# Altium PCB PlacaE3.PcbDoc
Units mm, origin at the board's own origin, x right, y up, seen from the top; angles counter-clockwise.
Board outline 100 x 100 mm, 2 copper layers (Top Layer, Bottom Layer); 70 components, 94 nets, 269 pads, 30 vias.
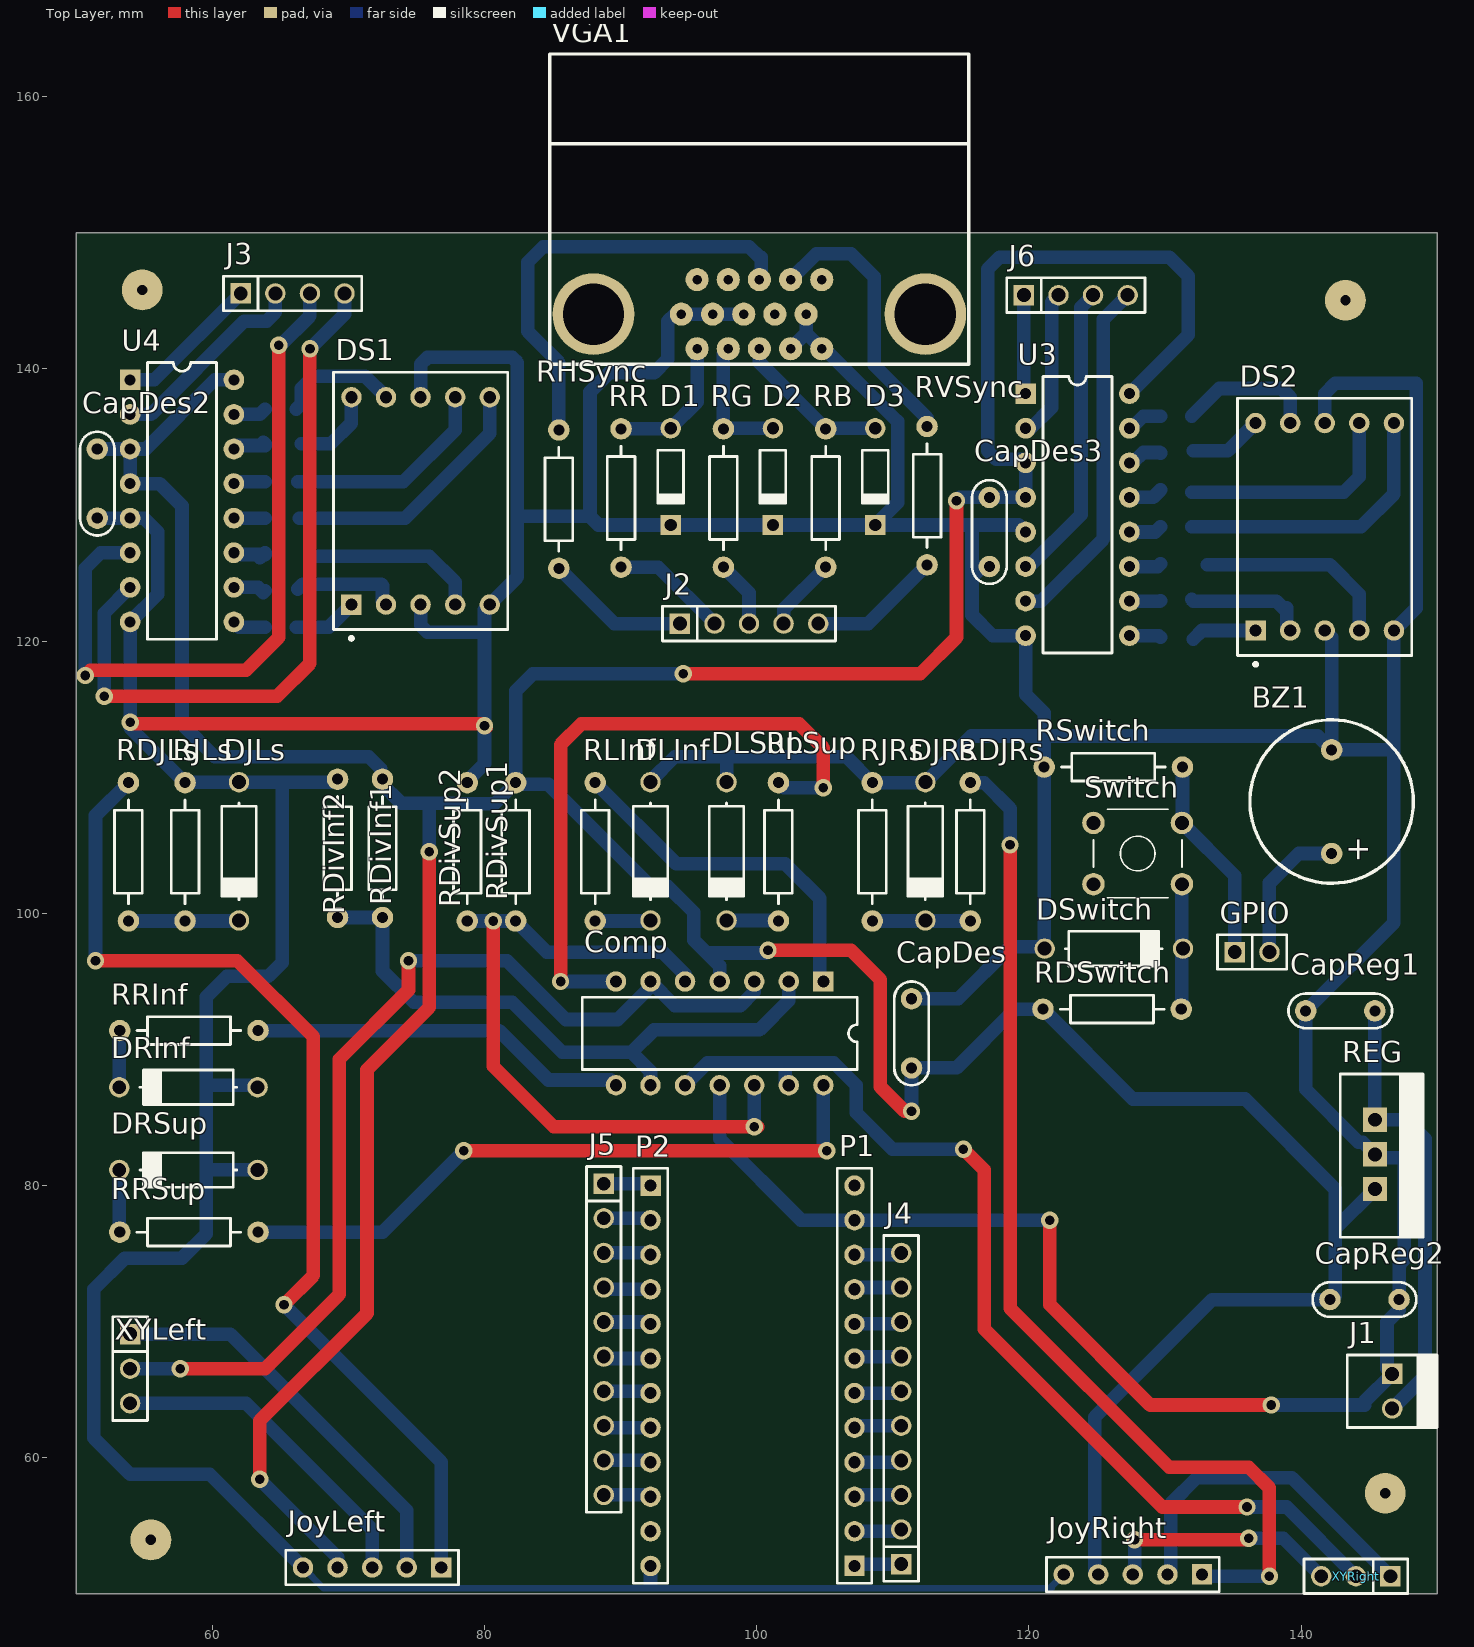
[diagram p0: Top Layer view]
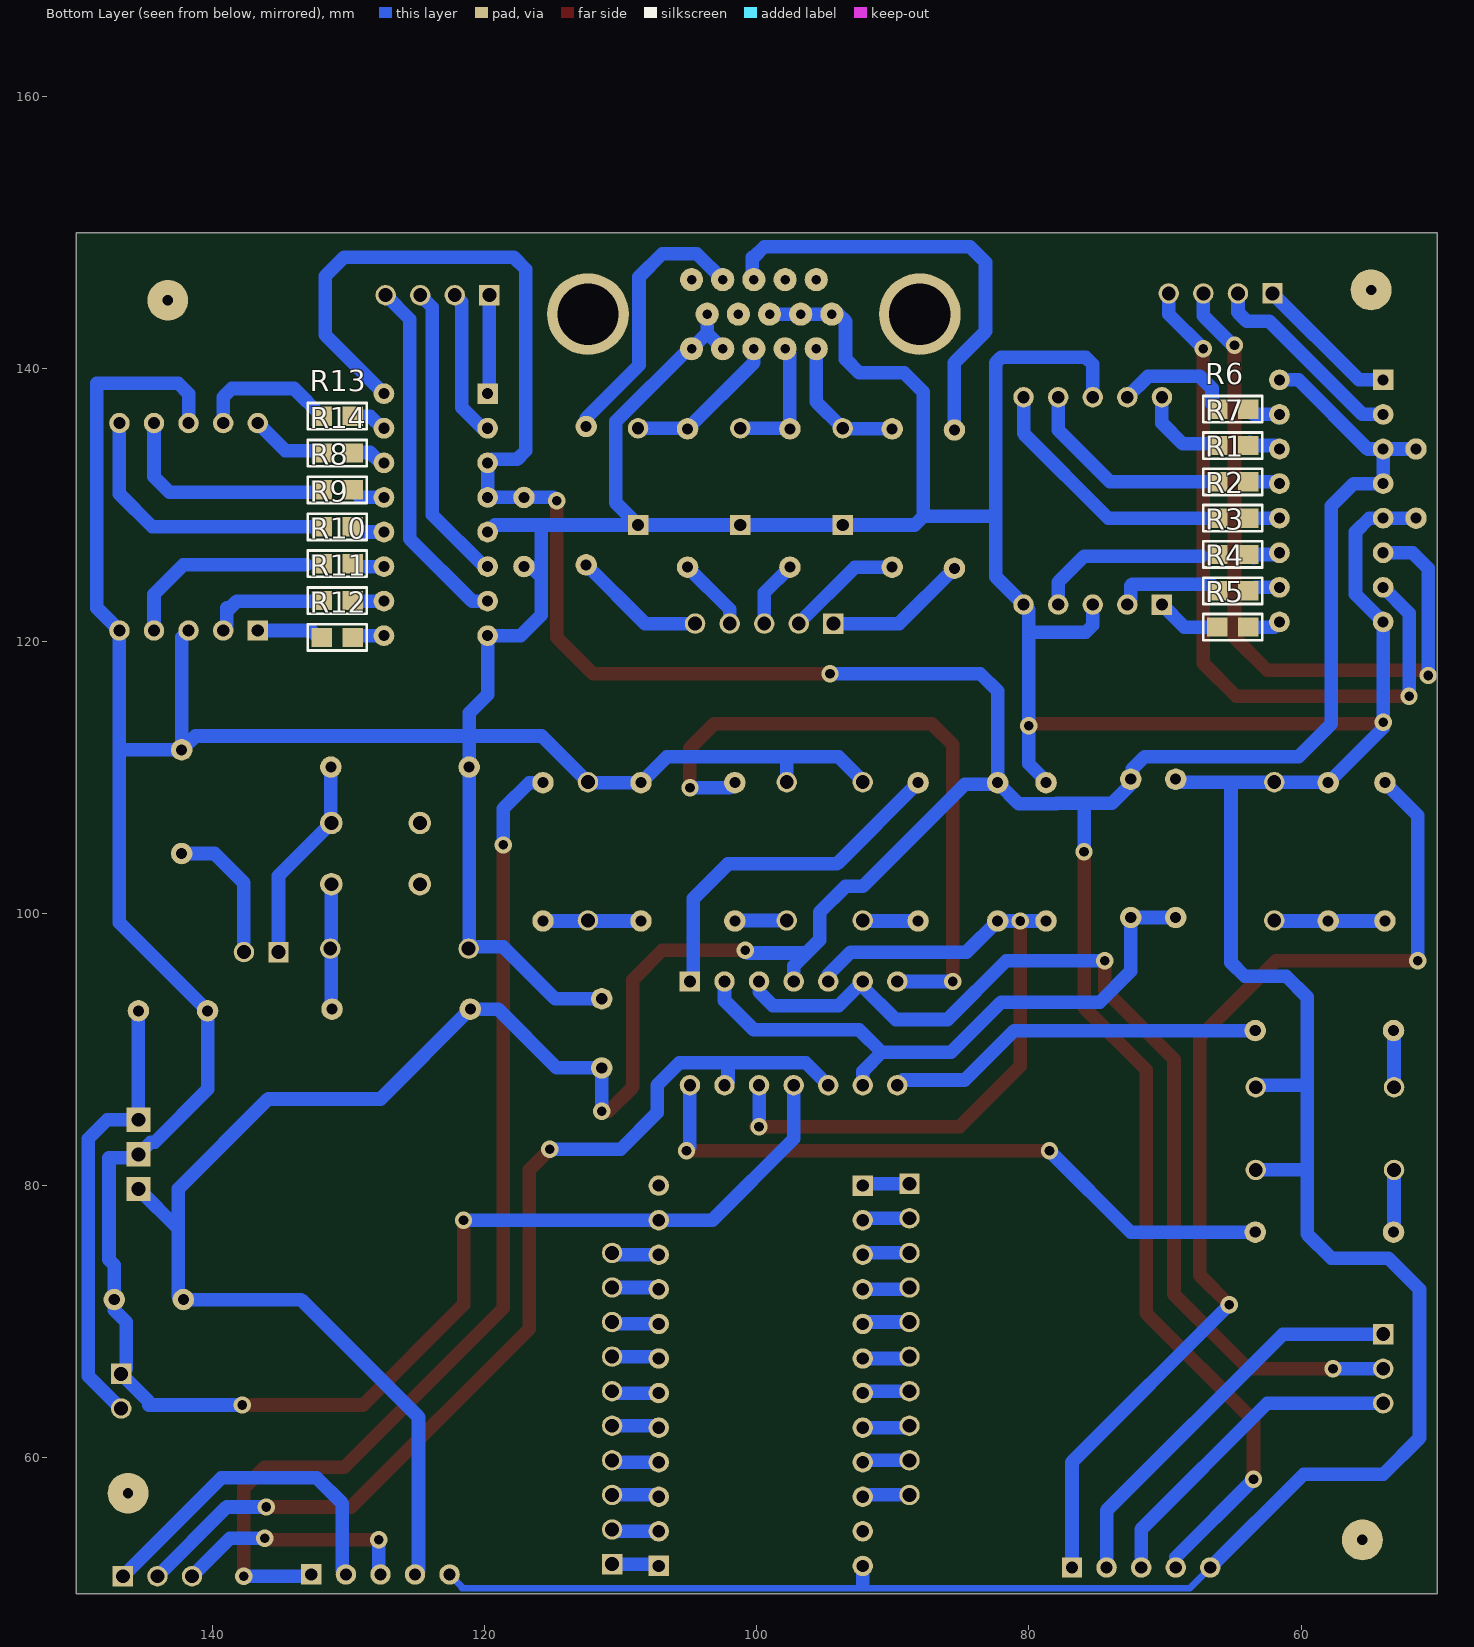
[diagram p1: Bottom Layer view, seen from below]

## Layer stack, top to bottom
Top Solder: solder mask 0.0102, Solder Resist, Dk 3.5
Top Layer: signal copper 0.0356
Dielectric1: dielectric 0.32, FR-4, Dk 4.8
Bottom Layer: signal copper 0.0356
Bottom Solder: solder mask 0.0102, Solder Resist, Dk 3.5

## Board outline
50,50 150,50 150,150 50,150

## Design rules (kind name [scope] priority, off if disabled: settings)
Clearance [All] p1: gap=0.254 ignorepadtopadclearanceinfootprint=FALSE except(0: Arc-Hole Track-Hole SMDPad-Hole THPad-Hole Via-Hole Fill-Hole Poly-Hole Region-Hole Text-Hole)
PolygonConnect [All] p1: connectstyle=Relief reliefconductorwidth=0.254 reliefentries=4 polygonreliefangle="90 Angle" airgapwidth=0.254
RoutingVias [All] p1: holewidth=0.711 width=1.27 viastyle="Through Hole" minholewidth=0.711 minwidth=1.27 maxholewidth=0.711 maxwidth=1.27
SolderMaskExpansion [All] p1: expansion=0.102
Width [All] p1: maxlimit=2 minlimit=0.5 preferedwidth=1
30 further rules are at their usual default settings.

## Components (designator, comment, footprint, x,y, rotation, side; value= is the part's Value field where it differs from the comment)
BZ1 "BUZZER" "BUZZER 12MM" 142.24,108.204 r90 top
CapDes "CAP" CAP200 111.379,91.186 r90 top
CapDes2 "CAP" CAP200 51.562,131.572 r270 top
CapDes3 "CAP" CAP200 117.094,128.016 r270 top
CapReg1 "CAP" CAP200 142.875,92.837 r180 top
CapReg2 "CAP" CAP200 144.653,71.628 r0 top
Comp "TL084J" J014 97.282,91.186 r180 top
D1 "Diode 1N4148" DO-35 93.682,132.08 r270 top
D2 "Diode 1N4148" DO-35 101.197,132.08 r270 top
D3 "Diode 1N4148" DO-35 108.712,132.08 r270 top
DJLs "DIODO" DO41 61.976,104.558 r270 top
DJRs "DIODO" DO41 112.395,104.558 r270 top
DLInf "DIODO" DO41 92.202,104.558 r270 top
DLSup "DIODO" DO41 97.79,104.558 r270 top
DRInf "DIODO" DO41 58.256,87.224 r180 top
DRSup "DIODO" DO41 58.256,81.153 r180 top
DS1 "Dpy Blue-CC" H 75.311,130.302 r0 top
DS2 "Dpy Blue-CC" H 141.732,128.397 r0 top
DSwitch "DIODO" DO41 126.238,97.409 r0 top
GPIO "CON2" SIP2 136.398,97.155 r0 top
J1 "MOLEX2" MOLEX2 146.685,66.167 r270 top
J2 "CON5" SIP5 94.361,121.285 r0 top
J3 "CON4" SIP4 65.913,145.542 r0 top
J4 "CON10" SIP10 110.617,52.197 r90 top
J5 "CON10" SIP10 88.773,80.137 r270 top
J6 "CON4" SIP4 123.444,145.415 r0 top
JoyLeft "Header 5" HDR1X5 76.835,51.943 r180 top
JoyRight "Header 5" HDR1X5 132.715,51.435 r180 top
P1 "Header 12" HDR1X12 107.188,52.06 r90 top
P2 "Header 12" HDR1X12 92.206,80 r270 top
R1 "RES" 0805 65.024,131.699 r0 bottom
R2 "RES" 0805 65.024,129.032 r0 bottom
R3 "RES" 0805 65.024,126.365 r0 bottom
R4 "RES" 0805 65.024,123.698 r0 bottom
R5 "RES" 0805 65.024,121.031 r0 bottom
R6 "RES" 0805 65.024,137.033 r0 bottom
R7 "RES" 0805 65.024,134.366 r0 bottom
R8 "RES" 0805 130.81,131.105 r0 bottom
R9 "RES" 0805 130.81,128.396 r0 bottom
R10 "RES" 0805 130.81,125.687 r0 bottom
R11 "RES" 0805 130.81,122.978 r0 bottom
R12 "RES" 0805 130.81,120.269 r0 bottom
R13 "RES" 0805 130.81,136.523 r0 bottom
R14 "RES" 0805 130.81,133.814 r0 bottom
RB "RES" RES400 105.073,125.433 r90 top
RDivInf1 "RES" RES400 72.517,109.855 r270 top
RDivInf2 "RES" RES400 69.215,109.855 r270 top
RDivSup1 "RES" RES400 82.296,109.601 r270 top
RDivSup2 "RES" RES400 78.74,109.601 r270 top
RDJLs "RES" RES400 53.848,109.601 r270 top
RDJRs "RES" RES400 115.697,109.601 r270 top
RDSwitch "RES" RES400 121.031,92.964 r0 top
REG "78XX" "TO-220 V" 145.415,82.296 r270 top
RG "RES" RES400 97.558,125.433 r90 top
RHSync "RES" RES400 85.471,125.349 r90 top
RJLs "RES" RES400 58.014,109.601 r270 top
RJRs "RES" RES400 108.496,109.601 r270 top
RLInf "RES" RES400 88.138,109.601 r270 top
RLSup "RES" RES400 101.6,109.601 r270 top
RR "RES" RES400 90.043,125.433 r90 top
RRInf "RES" RES400 63.373,91.389 r180 top
RRSup "RES" RES400 63.373,76.581 r180 top
RSwitch "RES" RES400 121.121,110.744 r0 top
RVSync "RES" RES400 112.522,125.603 r90 top
Switch "TACT SWITCH" TACTSWITCH 127.992,104.394 r90 top
U3 "CD4511" DIP16 119.761,138.176 r0 top
U4 "CD4511" DIP16 53.975,139.192 r0 top
VGA1 "DB15" DB15_DSUB 100.203,146.558 r180 top
XYLeft "CON3" SIP3 53.975,66.548 r270 top
XYRight "CON3" SIP3 144.018,51.308 r180 top

## Footprints (in the part's own frame and the unit in brackets; to place one, negate y for a bottom-side part, rotate by r counter-clockwise, add the part's x,y. Pads: shape width x height; smd on the part's side, far side on the other; paste and mask are expansions set on the pad)
0805 [mil] "Pasivo 0805"
  rect 60x56 smd: 1(-45,0) 2(45,0)
  silkscreen extent -85,-38 85,38, body extent -39,-25 39,25, height 15
"BUZZER 12MM" [mil]
  round 62 hole 32: 1(-150,0) 2(150,0)
  silkscreen extent -236,-236 237,236, body extent -368,-236 240,236, height 380
CAP200 [mil]
  round 62 hole 32: 1(-100,0) 2(100,0)
  silkscreen extent -150,-50 150,50, body extent -110,-46 110,44, height 246
DB15_DSUB [mm]
  round 6 hole 4.5: 0(-12.192,2.54) 16(12.192,2.54)
  round 1.7 hole 0.7: 1(4.58,5.08) 2(2.29,5.08) 3(0,5.08) 4(-2.29,5.08) 5(-4.58,5.08) 6(5.73,2.54) 7(3.44,2.54) 8(1.15,2.54) 9(-1.14,2.54) 10(-3.43,2.54) 11(4.58,0) 12(2.29,0) 13(0,0) 14(-2.29,0) 15(-4.58,0)
  silkscreen extent -15.39,-16.57 15.39,6.23
DIP16 [mil]
  rect 60x60 hole 32: 1(0,0)
  round 60 hole 32: 2(0,-100) 3(0,-200) 4(0,-300) 5(0,-400) 6(0,-500) 7(0,-600) 8(0,-700) 9(300,-700) 10(300,-600) 11(300,-500) 12(300,-400) 13(300,-300) 14(300,-200) 15(300,-100) 16(300,0)
  silkscreen extent 50,-750 250,50, body extent -3,-744 307,44, height 78
DO41 [mm]
  round 1.5 hole 1.016: 1(-5.08,0) 2(5.08,0)
  silkscreen extent -3.56,-1.27 3.56,1.27, body extent -5.46,-1.19 5.46,1.37, height 2.03
DO-35 [mm] "Diode, Axial; Body 3.8 x 1.9 mm (LxDia. max), Lead Dia. 0.53 mm (max)"
  round 1.5 hole 0.9: 1(-3.55,0)
  rect 1.5x1.5 hole 0.9: 2(3.55,0)
  silkscreen extent -1.95,-0.95 2.05,0.95
H [mm] "LED, 7-Segment Display, 14.2 mm, RHD; 10 Leads; Row Space 15.24 mm; Pitch 2.54 mm"
  rect 1.5x1.5 hole 0.9: 1(-5.08,-7.62)
  round 1.5 hole 0.9: 2(-2.54,-7.62) 3(0,-7.62) 4(2.54,-7.62) 5(5.08,-7.62) 6(5.08,7.62) 7(2.54,7.62) 8(0,7.62) 9(-2.54,7.62) 10(-5.08,7.62)
  silkscreen extent -6.4,-10.22 6.4,9.45, body extent -6.4,-9.45 6.4,9.45, height 8.25
HDR1X5 [mm] "Connector; Header; 5 Position"
  rect 1.5x1.5 hole 0.9: 1(0,0)
  round 1.5 hole 0.9: 2(2.54,0) 3(5.08,0) 4(7.62,0) 5(10.16,0)
  silkscreen extent -1.27,-1.27 11.43,1.27
HDR1X12 [mm] "Connector; Header; 12 Position"
  rect 1.5x1.5 hole 0.9: 1(0,0)
  round 1.5 hole 0.9: 2(2.54,0) 3(5.08,0) 4(7.62,0) 5(10.16,0) 6(12.7,0) 7(15.24,0) 8(17.78,0) 9(20.32,0) 10(22.86,0) 11(25.4,0) 12(27.94,0)
  silkscreen extent -1.27,-1.27 29.21,1.27
J014 [mm] "DIP; 14 Leads; Row Spacing 7.62 mm; Pitch 2.54 mm"
  rect 1.5x1.5 hole 0.9: 1(-7.62,-3.81)
  round 1.5 hole 0.9: 2(-5.08,-3.81) 3(-2.54,-3.81) 4(0,-3.81) 5(2.54,-3.81) 6(5.08,-3.81) 7(7.62,-3.81) 8(7.62,3.81) 9(5.08,3.81) 10(2.54,3.81) 11(0,3.81) 12(-2.54,3.81) 13(-5.08,3.81) 14(-7.62,3.81)
  silkscreen extent -10.1,-2.65 10.1,2.65
MOLEX2 [mm]
  rect 1.5x1.5 hole 1.016: 1(0,0)
  round 1.5 hole 1.016: 2(2.54,0)
  silkscreen extent -1.4,-3.3 3.94,3.3, body extent -1.27,-3.18 3.81,3.18, height 10.74
RES400 [mil]
  round 62 hole 32: 1(0,0) 2(400,0)
  silkscreen extent 50,-40 350,40, body extent -12,-45 412,46, height 96
SIP2 [mm]
  rect 1.5x1.5 hole 1.016: 1(-1.27,0)
  round 1.5 hole 1.016: 2(1.27,0)
  silkscreen extent -2.54,-1.27 2.54,1.27
SIP3 [mm]
  rect 1.5x1.5 hole 1.016: 1(-2.54,0)
  round 1.5 hole 1.016: 2(0,0) 3(2.54,0)
  silkscreen extent -3.81,-1.27 3.81,1.27, body extent -3.81,-1.3 3.81,1.24, height 8.38
SIP4 [mm]
  rect 1.5x1.5 hole 1.016: 1(-3.81,0)
  round 1.5 hole 1.016: 2(-1.27,0) 3(1.27,0) 4(3.81,0)
  silkscreen extent -5.08,-1.27 5.08,1.27, body extent -5.08,-1.27 5.08,1.27, height 8.38
SIP5 [mm]
  rect 1.5x1.5 hole 1.016: 1(0,0)
  round 1.5 hole 1.016: 2(2.54,0) 3(5.08,0) 4(7.62,0) 5(10.16,0)
  silkscreen extent -1.27,-1.27 11.43,1.27, body extent -1.27,-1.27 11.43,1.27, height 8.38
SIP10 [mm]
  rect 1.5x1.5 hole 1.016: 1(0,0)
  round 1.5 hole 1.016: 2(2.54,0) 3(5.08,0) 4(7.62,0) 5(10.16,0) 6(12.7,0) 7(15.24,0) 8(17.78,0) 9(20.32,0) 10(22.86,0)
  silkscreen extent -1.27,-1.27 24.13,1.27, body extent -1.27,-1.3 24.13,1.27, height 8.38
TACTSWITCH [mil]
  round 65 hole 40: 1(-88.58,-127.95) 2(-88.58,127.95) 3(88.58,-127.95) 4(88.58,127.95)
  silkscreen extent -128,-128 128,128, body extent -120,-156 124,156, height 276
"TO-220 V" [mil]
  rect 70x70 hole 40: 1(-100,0) 2(0,0) 3(100,0)
  silkscreen extent -232,-100 240,139, body extent -197,-79 197,118, height 709

## Part data
Comp: "JFET-Input Operational Amplifier"
D1 D2 D3: "High Conductance Fast Diode"
DS1 DS2: "14.2 mm General Purpose Blue 7-Segment Display: CC, RH DP, Gray Surface"
JoyLeft JoyRight: "Header, 5-Pin"
P1 P2: "Header, 12-Pin"
REG: "REGULDOR POSITIVO"
U3 U4: "BCD to 7 SEGMENTOS"
VGA1: "DB15 VGA Male Connector"

## Free pads (board coordinates)
  round 3 hole 0.762: 0(146.177,57.404) 1(55.499,53.975) 2(54.864,145.796) 3(143.256,145.034)

## Via types
v1: diameter 1.27, hole 0.711, Top Layer to Bottom Layer, 30 vias

## Nets (pads, with @x,y where several pads share a name; then routed paths per layer and width w, separated by ;. In a path a pad name is that pad's centre, name@x,y a point inside that pad or via, vN(x,y) a via of type N, cw(c..) or ccw(c..) an arc to the next point about the centre after c; other vN are vias at no path point)
3.3V: J4.10 P1.10 | length 3.5
  Bottom Layer w1: P1.10 110.48,74.92 J4.10
5V: CapDes2.1 CapDes3.1 CapDes.1 CapReg2.1 Comp.4 JoyLeft.4 JoyRight.4 RDivInf1.1 RDivSup1.1 RDSwitch.1 REG.3 U3.3 U3.4 U3.16 U4.3 U4.4 U4.16 | length 361.7
  Top Layer w1: v1(63.5,58.42) 63.5,62.738 71.374,70.612 71.374,88.519 75.946,93.091 v1(75.946,104.521) ; v1(94.615,117.602) 112.014,117.602 114.681,120.269 v1(114.681,130.302) ; v1(100.838,97.282) 106.934,97.282 109.093,95.123 109.093,87.249 110.871,85.471 v1(111.379,85.471)
  Bottom Layer w1: CapDes2.1 U4.3 ; U4.16 60.198,139.192 55.118,134.112 U4.3 ; v1(63.5,58.42) 69.215,52.705 JoyLeft.4 ; v1(75.946,104.521) 75.946,108.067 75.936,108.077 ; v1(94.615,117.602) 83.566,117.602 82.296,116.332 RDivSup1.1 ; Comp.4 97.282,96.139 96.329,97.091 ; v1(100.838,97.282) 100.647,97.091 96.329,97.091 ; v1(111.379,85.471) CapDes.1 114.681,88.646 118.999,92.964 RDSwitch.1 127.635,86.36 135.89,86.36 142.494,79.756 142.494,76.835 ; v1(114.681,130.302) 114.935,130.556 CapDes3.1 U3.4 U3.3 119.507,133.35 117.602,133.35 116.967,133.985 116.967,147.32 117.856,148.209 130.302,148.209 131.699,146.812 131.699,142.494 U3.16 ; JoyRight.4 124.841,51.689 124.841,62.992 133.477,71.628 CapReg2.1 ; CapReg2.1@142.494,71.882 142.494,76.835 ; REG.3 142.494,76.835 ; U4.3 U4.4 56.134,131.572 57.785,129.921 57.785,113.919 60.198,111.506 71.501,111.506 72.39,110.617 72.39,109.601 73.914,108.077 75.936,108.077 ; 75.936,108.077 77.957,108.077 77.975,108.06 80.755,108.06 RDivSup1.1 ; RDivSup1.1 82.55,109.601 82.677,109.474 84.709,109.474 92.202,101.981 93.472,101.981 95.377,100.076 95.377,98.044 96.329,97.091
A1: J3.4 U4.7 | length 52.9
  Top Layer w1: v1(52.07,115.951) 64.77,115.951 67.183,118.364 v1(67.183,141.478)
  Bottom Layer w1: v1@52.07,116.205 52.07,122.047 U4.7 ; v1(67.183,141.478) 69.723,144.018 J3.4
A2: J6.4 U3.7 | length 26.3
  Bottom Layer w1: U3.7 120.904,122.936 125.476,127.508 125.476,143.637 J6.4
B: J2.4 RB.1 | length 5.4
  Bottom Layer w1: J2.4 101.981,122.341 RB.1
B1: J3.1 U4.1 | length 10.8
  Bottom Layer w1: U4.1 55.753,139.192 J3.1
B2: J6.1 U3.1 | length 7.3
  Bottom Layer w1: J6.1 119.634,138.303 U3.1
BUZZER: BZ1.1 GPIO.2 | length 10.5
  Bottom Layer w1: GPIO.2 137.668,102.235 139.827,104.394 BZ1.1
C1: J3.2 U4.2 | length 15.2
  Bottom Layer w1: U4.2 55.499,136.652 62.357,143.51 64.008,143.51 64.643,144.145 J3.2
C2: J6.2 U3.2 | length 11
  Bottom Layer w1: U3.2 120.142,135.636 121.666,137.16 121.666,144.907 J6.2
D1: J3.3 U4.6 | length 53.3
  Top Layer w1: v1(50.673,117.475) 51.054,117.856 62.484,117.856 64.897,120.269 v1(64.897,141.732)
  Bottom Layer w1: v1(50.673,117.475) 50.673,125.349 51.816,126.492 U4.6 ; v1@64.96,141.668 67.183,143.891 J3.3
D2: J6.3 U3.6 | length 22.1
  Bottom Layer w1: U3.6 120.015,125.476 123.825,129.286 123.825,144.526 J6.3
G: J2.3 RG.1 | length 4.9
  Bottom Layer w1: RG.1 99.441,123.55 J2.3
GND: BZ1.2 CapDes2.2 CapDes3.2 CapDes.2 CapReg1.2 CapReg2.2 Comp.11 D1.2 D2.2 D3.2 DJLs.1 DJRs.1 DLInf.1 DLSup.1 DRInf.1 DRSup.1 DS1.3 DS1.5 DS1.8 DS2.3 DS2.5 DS2.8 DSwitch.1 J1.1 JoyLeft.5 JoyRight.5 P1.11 P2.12 RDivInf2.1 RDivSup2.1 REG.2 RJLs.1 RJRs.1 RSwitch.1 U3.5 U3.8 U4.5 U4.8 VGA1.4 VGA1.5 VGA1.6 VGA1.7 VGA1.8 VGA1.10 | length 611.5
  Top Layer w1: v1@54.254,113.919 79.883,113.919 v1(80.01,113.792) ; v1(121.529,77.46) 121.529,71.257 128.905,63.881 v1(137.795,63.881) ; v1(80.01,113.792) 80.137,113.665 80.01,113.665 v1(80.01,113.792)
  Bottom Layer w0.5: JoyLeft.5 68.199,50.419 121.666,50.419 121.666,50.546 JoyRight.5
  Bottom Layer w1: CapDes2.2 U4.5 54.991,129.032 56.007,128.016 56.007,123.444 U4.8 v1(53.975,114.046) 53.975,113.64 RJLs.1 58.051,109.638 DJLs.1 65.405,109.638 ; DRSup.1 59.563,81.153 ; DRInf.1 63.183,87.376 59.563,87.376 ; JoyLeft.5 59.817,58.801 53.975,58.801 51.308,61.468 51.308,72.39 53.594,74.676 57.785,74.676 59.563,76.454 59.563,81.153 ; RDivInf2.1@69.342,109.601 69.305,109.638 65.405,109.638 ; DS1.3 75.311,121.158 75.819,120.65 79.756,120.65 80.01,120.904 ; DS1.8 75.311,140.335 75.819,140.843 82.042,140.843 82.423,140.462 82.423,129.032 ; RDivSup2.1@78.613,109.601 80.01,110.998 v1(80.01,113.792) 80.01,120.904 ; 92.202,50.673 92.202,52.056 P2.12 ; DLInf.1 92.202,109.728 93.98,111.506 97.663,111.506 ; Comp.11 97.282,83.439 103.251,77.47 103.241,77.46 P1.11 v1(121.529,77.46) ; DLSup.1 97.79,111.379 97.663,111.506 ; VGA1.8 VGA1.7 VGA1.6 93.98,144.018 93.472,143.51 93.472,140.716 92.456,139.7 89.154,139.7 87.757,138.303 87.757,129.159 ; VGA1.4 103.633,142.618 ; VGA1.10 103.633,142.618 ; CapDes.2 114.808,93.726 118.618,97.536 121.031,97.536 DSwitch.1@121.121,97.446 ; CapDes3.2 116.586,125.476 115.824,124.714 ; U3.5 119.247,128.53 115.824,128.53 ; DSwitch.1 DSwitch.1@121.121,97.446 ; v1(137.795,63.881) 139.827,63.881 ; 140.081,63.881 144.653,63.881 ; DS2.3 142.24,120.269 BZ1.2 ; DS2.8 141.732,138.176 142.494,138.938 148.463,138.938 148.463,122.428 DS2.5 146.812,112.014 ; 144.653,64.135 J1.1 146.304,66.548 146.304,69.977 147.193,70.866 CapReg2.2 147.193,74.168 147.574,74.549 147.574,82.042 145.669,82.042 REG.2 144.518,83.193 144.214,83.193 140.335,87.072 CapReg1.2 146.812,99.314 146.812,112.014 ; 59.563,81.153 59.563,87.376 ; 59.563,87.376 59.563,93.853 61.087,95.377 64.135,95.377 65.151,96.393 65.151,109.384 65.405,109.638 ; 80.01,120.904 80.01,122.301 DS1.5 82.423,124.714 82.423,129.032 ; 82.423,129.032 82.55,129.159 87.757,129.159 ; 87.757,129.159 88.386,128.53 D1.2 D2.2 D3.2 ; 97.663,111.506 106.591,111.506 RJRs.1 112.358,109.601 DJRs.1 115.787,113.03 121.121,113.03 ; 103.633,142.618 103.643,142.618 VGA1.5 104.991,141.478 110.325,136.144 110.363,136.144 110.363,130.181 D3.2 ; D3.2 115.824,128.53 ; 115.824,124.714 115.824,128.53 ; 115.824,124.714 115.824,121.92 117.348,120.396 U3.8 119.761,116.078 121.121,114.718 121.121,113.03 ; DSwitch.1@121.121,97.446 RSwitch.1 121.121,113.03 ; 121.121,113.03 141.224,113.03 BZ1.2 ; BZ1.2 146.812,112.014
GPSWITCH: GPIO.1 RSwitch.2 Switch.3 | length 15.2
  Bottom Layer w1: RSwitch.2 131.281,106.682 Switch.3 135.128,102.758 GPIO.1
H_SYNC: J2.1 RHSync.1 | length 10.6
  Bottom Layer w1: RHSync.1 89.535,121.285 J2.1
JL: Comp.3 Comp.6 XYLeft.2 | length 74.7
  Top Layer w1: v1(57.658,66.548) 63.881,66.548 69.342,72.009 69.342,89.281 74.422,94.361 v1(74.422,96.52)
  Bottom Layer w1: XYLeft.2 v1(57.658,66.548) ; v1(74.422,96.52) 81.661,96.52 85.979,92.202 89.789,92.202 92.202,94.615 Comp.6 93.98,93.218 98.806,93.218 99.822,94.234 Comp.3
JLINF: DLInf.2 RLInf.2 | length 4.1
  Bottom Layer w1: RLInf.2 92.165,99.441 DLInf.2
JLS: JoyLeft.1 RDJLs.1 | length 77.1
  Top Layer w1: v1(51.435,96.52) 61.849,96.52 67.437,90.932 67.437,73.406 v1(65.278,71.247)
  Bottom Layer w1: v1(51.435,96.52) 51.435,107.188 RDJLs.1 ; v1(65.278,71.247) 76.835,59.69 JoyLeft.1
JLSUP: DLSup.2 RLSup.2 | length 3.8
  Bottom Layer w1: DLSup.2 101.563,99.478 RLSup.2
JLSWITCH: DJLs.2 RDJLs.2 RJLs.2 | length 8.1
  Bottom Layer w1: RDJLs.2 RJLs.2 61.939,99.441 DJLs.2
JLX: JoyLeft.3 XYLeft.3 | length 24.4
  Bottom Layer w1: XYLeft.3 62.484,64.008 71.755,54.737 JoyLeft.3
JLY: JoyLeft.2 XYLeft.1 | length 29.9
  Bottom Layer w1: XYLeft.1 61.341,69.088 74.295,56.134 JoyLeft.2
JR: Comp.10 Comp.13 XYRight.2 | length 75.4
  Top Layer w1: v1(115.189,82.677) 116.713,81.153 116.713,69.469 129.794,56.388 v1(136.017,56.388)
  Bottom Layer w1: Comp.10 96.393,89.027 102.108,89.027 ; Comp.13 102.108,87.63 102.108,89.027 ; v1(115.189,82.677) 109.982,82.677 107.315,85.344 107.315,87.376 105.664,89.027 102.108,89.027 ; v1(136.017,56.388) 138.938,56.388 XYRight.2
JRINF: DRInf.2 RRInf.2 | length 4.2
  Bottom Layer w1: DRInf.2 53.176,91.352 RRInf.2
JRS: JoyRight.1 RDJRs.1 | length 76.4
  Top Layer w1: v1(118.618,105.029) 118.618,70.993 130.302,59.309 136.144,59.309 137.668,57.785 v1(137.668,51.308)
  Bottom Layer w1: RDJRs.1 116.713,109.601 118.618,107.696 v1(118.618,105.029) ; JoyRight.1 132.842,51.308 v1(137.668,51.308)
JRSUP: DRSup.2 RRSup.2 | length 4.6
  Bottom Layer w1: DRSup.2 53.176,76.618 RRSup.2
JRSWITCH: DJRs.2 RDJRs.2 RJRs.2 | length 7.2
  Bottom Layer w1: RJRs.2 RDJRs.2
JRX: JoyRight.3 XYRight.3 | length 17.5
  Top Layer w1: v1(127.762,53.975) 135.89,53.975 136.017,54.102 v1(136.144,54.102)
  Bottom Layer w1: JoyRight.3 127.762,51.562 v1(127.762,53.975) ; v1(136.144,54.102) 138.684,54.102 XYRight.3
JRY: JoyRight.2 XYRight.1 | length 25.2
  Bottom Layer w1: JoyRight.2 130.429,51.689 130.429,56.642 132.334,58.547 139.319,58.547 XYRight.1
NetCapReg1_1: CapReg1.1 J1.2 REG.1 | length 33.1
  Bottom Layer w1: CapReg1.1 REG.1 147.701,84.836 149.098,83.439 149.098,66.014 146.711,63.627 J1.2
NetComp_1: Comp.1 RLInf.1 | length 26.2
  Bottom Layer w1: RLInf.1 94.107,103.632 102.108,103.632 104.648,101.092 104.648,95.25 Comp.1
NetComp_7: Comp.7 RLSup.1 | length 48.5
  Top Layer w1: v1(85.598,94.996) 85.598,112.395 87.122,113.919 103.124,113.919 104.902,112.141 v1(104.902,109.22)
  Bottom Layer w1: v1(85.598,94.996) Comp.7 ; RLSup.1 101.981,109.22 v1(104.902,109.22)
NetComp_8: Comp.8 RRInf.1 | length 28
  Bottom Layer w1: RRInf.1 81.077,91.389 84.709,87.757 89.281,87.757 Comp.8
NetComp_14: Comp.14 RRSup.1 | length 49.2
  Top Layer w1: v1(78.486,82.55) v1(105.156,82.55)
  Bottom Layer w1: RRSup.1 72.517,76.581 v1(78.486,82.55) ; Comp.14 104.902,82.804 v1(105.156,82.55)
NetDS1_1: DS1.1 R5.2 | length 4.7
  Bottom Layer w1: R5.2 68.58,121.031 DS1.1
NetDS1_2: DS1.2 R4.2 | length 7.9
  Bottom Layer w1: R4.2@66.294,123.825 66.655,124.186 72.41,124.186 72.517,124.079 72.517,122.936 DS1.2
NetDS1_4: DS1.4 R3.2 | length 13
  Bottom Layer w1: 67.31,126.238 75.946,126.238 77.851,124.333 DS1.4
NetDS1_6: DS1.6 R2.2 | length 19.2
  Bottom Layer w1: R2.2@66.421,129.032 74.168,129.032 80.391,135.255 DS1.6
NetDS1_7: DS1.7 R1.2 | length 15.5
  Bottom Layer w1: R1.2@66.294,131.699 74.041,131.699 77.851,135.509 DS1.7
NetDS1_9: DS1.9 R6.2 | length 8.9
  Bottom Layer w1: R6.2 66.548,137.414 66.548,138.557 67.437,139.446 71.247,139.446 DS1.9
NetDS1_10: DS1.10 R7.2 | length 6.2
  Bottom Layer w1: R7.2@66.548,134.493 68.707,134.493 70.231,136.017 DS1.10
NetDS2_1: DS2.1 R12.2 | length 4.8
  Bottom Layer w1: R12.2@132.08,120.142 132.715,120.777 DS2.1
NetDS2_2: DS2.2 R11.2 | length 9
  Bottom Layer w1: R11.2@131.953,123.063 132.08,122.936 138.176,122.936 138.684,122.428 138.938,122.428 138.938,121.031 DS2.2
NetDS2_4: DS2.4 R10.2 | length 14.7
  Bottom Layer w1: 133.096,125.603 142.113,125.603 144.272,123.444 DS2.4
NetDS2_6: DS2.6 R9.2 | length 21.1
  Bottom Layer w1: R9.2 144.398,128.396 146.812,130.81 DS2.6
NetDS2_7: DS2.7 R8.2 | length 16.7
  Bottom Layer w1: R8.2@131.953,130.937 143.129,130.937 144.272,132.08 DS2.7
NetDS2_9: DS2.9 R13.2 | length 10.2
  Bottom Layer w1: R13.2 133.987,138.557 138.557,138.557 139.192,137.922 DS2.9
NetDS2_10: DS2.10 R14.2 | length 5.4
  Bottom Layer w1: R14.2@132.08,133.985 134.62,133.985 DS2.10
NetDSwitch_2: DSwitch.2 RDSwitch.2 Switch.1 | length 8.8
  Bottom Layer w1: Switch.1 131.242,93.421 RDSwitch.2@131.318,93.345
NetR1_1: R1.1 U4.13 | length 2.3
  Bottom Layer w1: U4.13 61.722,131.699 R1.1
NetR2_1: R2.1 U4.12 | length 2.3
  Bottom Layer w1: U4.12 R2.1
NetR3_1: R3.1 U4.11 | length 2.9
  Bottom Layer w1: U4.11 61.722,126.365 R3.1@63.754,126.365 ; R3.1@63.5,126.111 R3.1@63.754,126.365 ; R3.1 R3.1@63.754,126.365 ; R3.1@63.881,126.492 R3.1@63.754,126.365
NetR4_1: R4.1 U4.10 | length 2.5
  Bottom Layer w1: U4.10 63.373,123.952 63.754,123.571 R4.1
NetR5_1: R5.1 U4.9 | length 2.4
  Bottom Layer w1: U4.9 61.976,121.031 R5.1
NetR6_1: R6.1 U4.15 | length 2.4
  Bottom Layer w1: U4.15 63.5,136.652 R6.1
NetR7_1: R7.1 U4.14 | length 2.6
  Bottom Layer w1: U4.14 61.849,134.366 R7.1 ; R7.1@63.754,134.62 R7.1@63.881,134.493
NetR8_1: R8.1 U3.13 | length 2.5
  Bottom Layer w1: U3.13 129.118,130.556 R8.1
NetR9_1: R9.1 U3.12 | length 2.4
  Bottom Layer w1: U3.12 129.287,128.016 R9.1
NetR10_1: R10.1 U3.11 | length 2.4
  Bottom Layer w1: U3.11 129.456,125.476 R10.1
NetR11_1: R11.1 U3.10 | length 2.3
  Bottom Layer w1: U3.10 129.625,122.936 R11.1
NetR12_1: R12.1 U3.9 | length 2.3
  Bottom Layer w1: U3.9 129.54,120.396 R12.1
NetR13_1: R13.1 U3.15 | length 2.7
  Bottom Layer w1: U3.15 127.508,135.636 128.397,136.525 129.665,136.525 R13.1
NetR14_1: R14.1 U3.14 | length 2.6
  Bottom Layer w1: U3.14 127.635,133.096 128.397,133.858 129.623,133.858 R14.1
P1: J5.1 P2.1 | length 3.5
  Bottom Layer w1: J5.1 92.069,80.137 P2.1
P2: J5.2 P2.2 | length 3.5
  Bottom Layer w1: J5.2 92.069,77.597 P2.2
P3: J5.3 P2.3 | length 3.5
  Bottom Layer w1: J5.3 92.069,75.057 P2.3
P4: J5.4 P2.4 | length 3.5
  Bottom Layer w1: J5.4 88.91,72.38 P2.4
P5: J5.5 P2.5 | length 3.5
  Bottom Layer w1: J5.5 92.069,69.977 P2.5
P6: J5.6 P2.6 | length 3.5
  Bottom Layer w1: J5.6 88.91,67.3 P2.6
P7: J5.7 P2.7 | length 3.5
  Bottom Layer w1: J5.7 92.069,64.897 P2.7
P8: J5.8 P2.8 | length 3.5
  Bottom Layer w1: J5.8 88.91,62.22 P2.8
P9: J5.9 P2.9 | length 3.5
  Bottom Layer w1: J5.9 92.069,59.817 P2.9
P10: J5.10 P2.10 | length 3.5
  Bottom Layer w1: J5.10 92.069,57.277 P2.10
P11: P2.11
P13: J4.1 P1.1 | length 3.5
  Bottom Layer w1: P1.1 107.325,52.197 J4.1
P14: J4.2 P1.2 | length 3.5
  Bottom Layer w1: P1.2 110.48,54.6 J4.2
P15: J4.3 P1.3 | length 3.5
  Bottom Layer w1: P1.3 107.325,57.277 J4.3
P16: J4.4 P1.4 | length 3.5
  Bottom Layer w1: P1.4 110.48,59.68 J4.4
P17: J4.5 P1.5 | length 3.5
  Bottom Layer w1: P1.5 107.325,62.357 J4.5
P18: J4.6 P1.6 | length 3.5
  Bottom Layer w1: P1.6 110.48,64.76 J4.6
P19: J4.7 P1.7 | length 3.5
  Bottom Layer w1: P1.7 107.325,67.437 J4.7
P20: J4.8 P1.8 | length 3.5
  Bottom Layer w1: P1.8 110.48,69.84 J4.8
P21: J4.9 P1.9 | length 3.5
  Bottom Layer w1: P1.9 107.325,72.517 J4.9
R: J2.2 RR.1 | length 8.6
  Bottom Layer w1: RR.1 92.78,125.433 96.901,121.311 J2.2
RAW: P1.12
V_SYNC: J2.5 RVSync.1 | length 9.8
  Bottom Layer w1: J2.5 108.204,121.285 RVSync.1
VGA_1: D1.1 RR.2 VGA1.1 | length 10.3
  Bottom Layer w1: RR.2 93.645,135.593 D1.1 95.623,137.571 VGA1.1
VGA_2: D2.1 RG.2 VGA1.2 | length 9.7
  Bottom Layer w1: VGA1.2 97.558,141.123 RG.2 97.595,135.63 D2.1
VGA_3: D3.1 RB.2 VGA1.3 | length 11.6
  Bottom Layer w1: VGA1.3 100.203,140.463 RB.2 105.11,135.63 D3.1
VGA_13: RHSync.2 VGA1.13 | length 32.9
  Bottom Layer w1: RHSync.2 85.471,140.462 83.185,142.748 83.185,147.828 84.328,148.971 99.441,148.971 100.203,148.209 100.33,148.209 100.33,146.685 VGA1.13
VGA_14: RVSync.2 VGA1.14 | length 20.2
  Bottom Layer w1: VGA1.14 104.398,148.463 106.934,148.463 108.641,146.756 108.641,140.264 112.522,136.383 RVSync.2
VINF: Comp.2 Comp.9 RDivInf1.2 RDivInf2.2 | length 45.5
  Bottom Layer w1: RDivInf2.2 RDivInf1.2 72.517,95.758 74.803,93.472 82.042,93.472 85.725,89.789 90.805,89.789 ; Comp.9 92.202,88.392 90.805,89.789 ; Comp.2 102.362,93.599 100.203,91.44 92.456,91.44 90.805,89.789
VSUP: Comp.5 Comp.12 RDivSup1.2 RDivSup2.2 | length 53.1
  Top Layer w1: v1(80.645,99.441) 80.645,88.773 85.09,84.328 v1(99.822,84.328) v1@100.076,84.328
  Bottom Layer w1: RDivSup2.2 v1(80.645,99.441) RDivSup1.2 84.582,97.155 93.091,97.155 94.742,95.504 Comp.5 ; v1(99.822,84.328) Comp.12
pads on no net: Switch.2 Switch.4 VGA1.0 VGA1.9 VGA1.11 VGA1.12 VGA1.15 VGA1.16

## Text inside footprints (layer, text, board x,y; h text height)
BZ1: Top Overlay "+" at 144.94,103.704 h1.7 r90